# Altium PCB Duckuino.PcbDoc
Units mm, origin at the board's own origin, x right, y up, seen from the top; angles counter-clockwise.
Board outline 48.64 x 17.65 mm, 2 copper layers (Top Layer, Bottom Layer); 29 components, 37 nets, 137 pads, 36 vias.
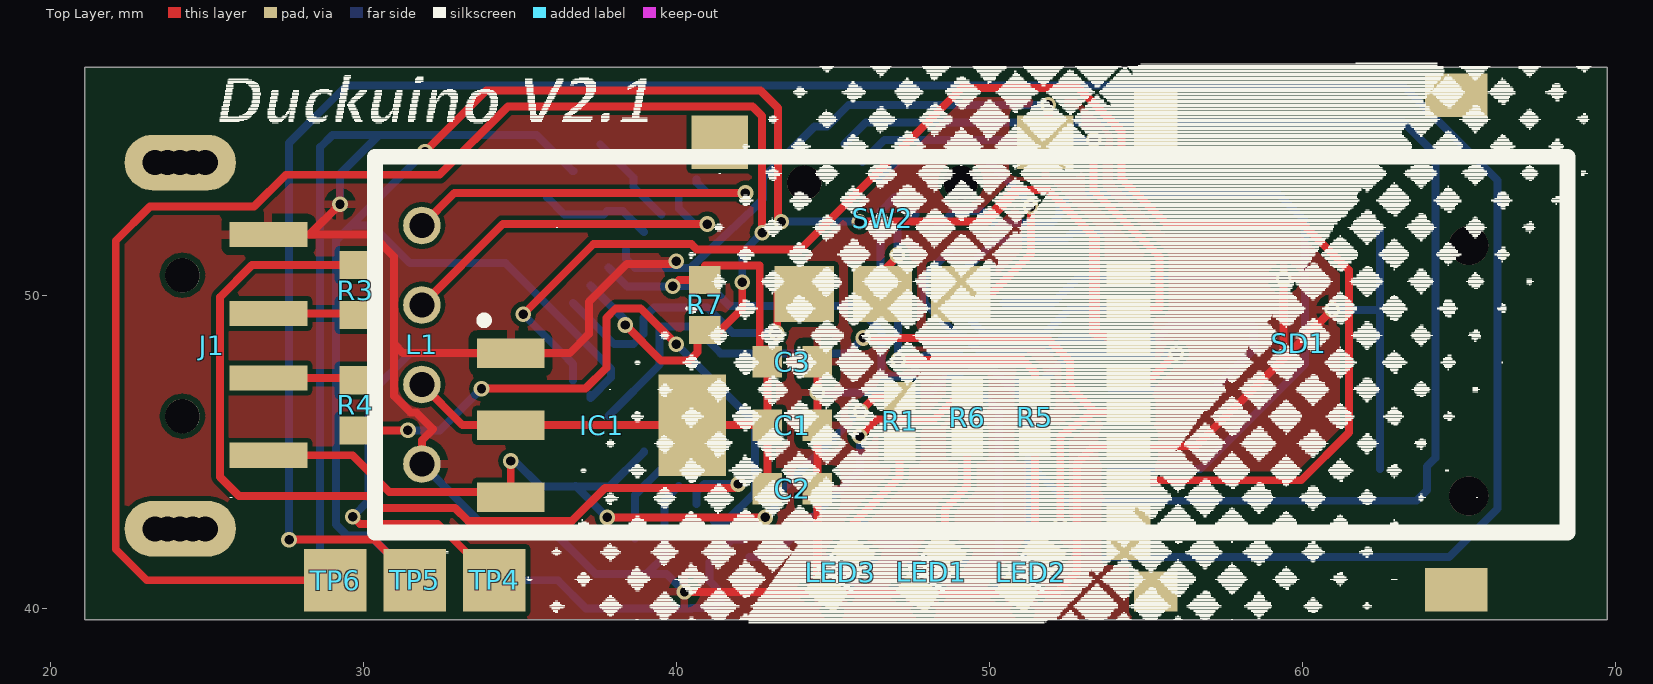
[diagram p0: Top Layer view]
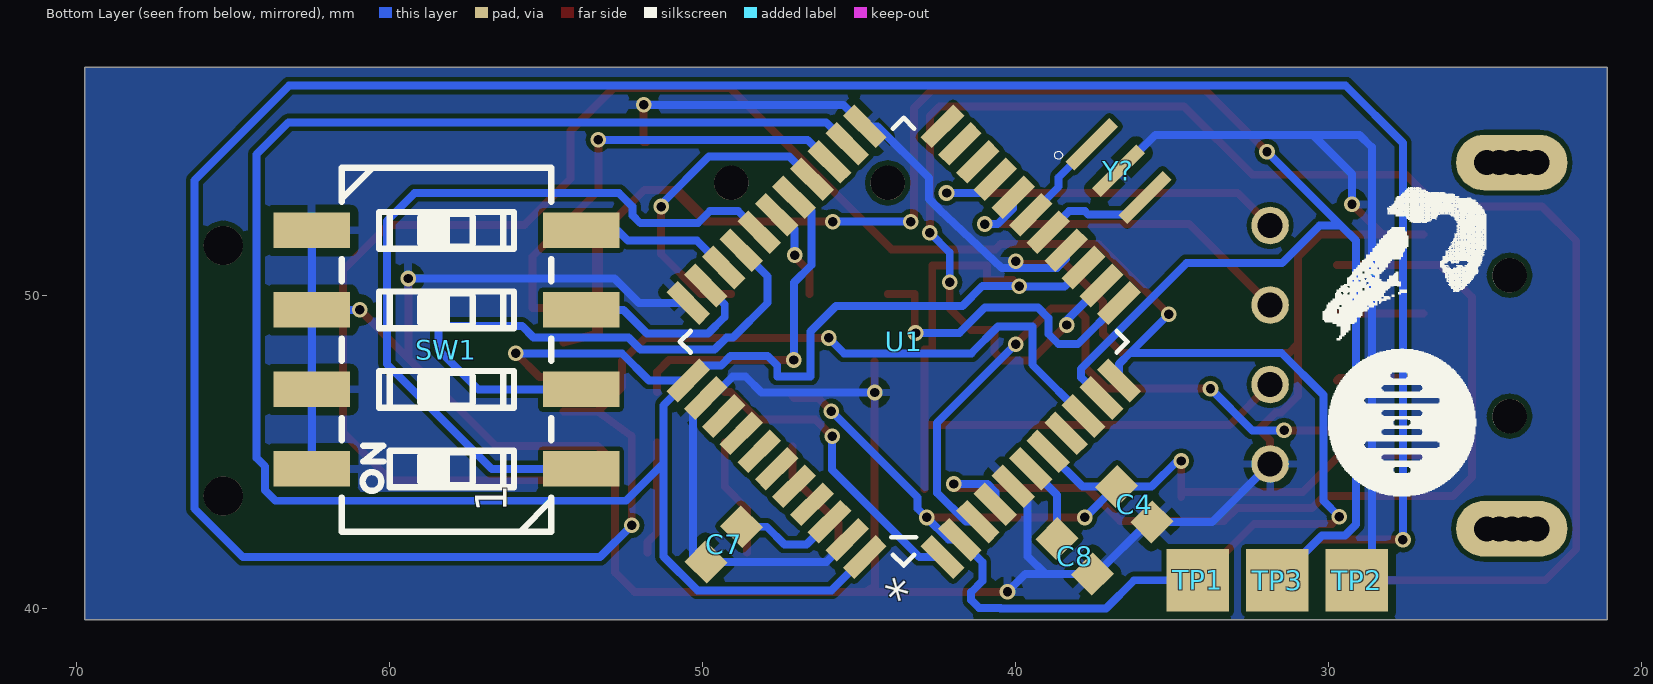
[diagram p1: Bottom Layer view, seen from below]
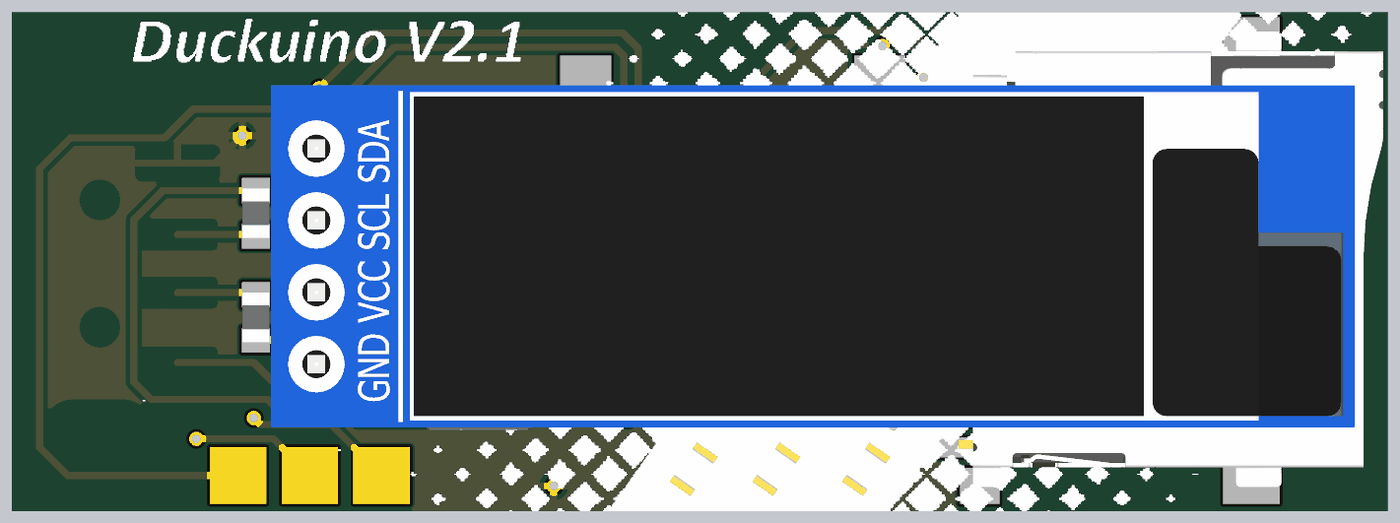
[diagram p2: 3D render of the assembled board from above, using the file's embedded part models]
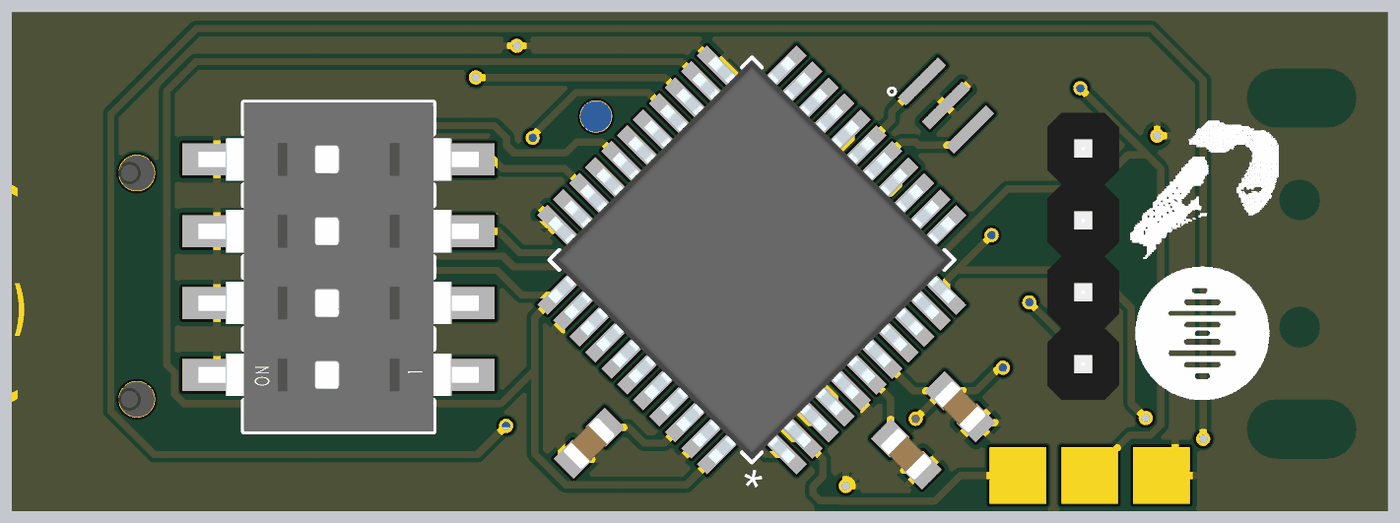
[diagram p3: 3D render of the assembled board from below, using the file's embedded part models]

## Layer stack, top to bottom
Top Solder: solder mask 0.0102, Solder Resist, Dk 3.5
Top Layer: signal copper 0.0356
Dielectric 1: dielectric 0.32, FR-4, Dk 4.8
Bottom Layer: signal copper 0.0356
Bottom Solder: solder mask 0.0102, Solder Resist, Dk 3.5

## Board outline
21.082,39.624 69.723,39.624 69.723,57.277 21.082,57.277

## Design rules (kind name [scope] priority, off if disabled: settings)
Clearance [All] p1: gap=0.152 ignorepadtopadclearanceinfootprint=FALSE except(0.254: Arc-Arc Arc-Track Track-Track)
ComponentClearance [All] p1: gap=0 collisioncheckmode=3 verticalgap=0 showdistances=FALSE
PolygonConnect [All] p1: connectstyle=Relief reliefconductorwidth=0.254 reliefentries=4 polygonreliefangle="90 Angle" airgapwidth=0.254
RoutingCorners [All] p1: cornerstyle=Round minsetback=2.54 maxsetback=2.54
RoutingLayers RoutingLayers_1 [All] p1: top layer_v5=TRUE bottom layer_v5=TRUE
RoutingVias [All] p1: holewidth=0.3 width=0.5 viastyle="Through Hole" minholewidth=0.3 minwidth=0.5 maxholewidth=0.3 maxwidth=0.5
ShortCircuit [All] p1: allowed=TRUE
SolderMaskExpansion [All] p1: expansion=0.102
Width [All] p1: maxlimit=0.254 minlimit=0.254 preferedwidth=0.254
26 further rules are at their usual default settings.

## Components (designator, comment, footprint, x,y, rotation, side; value= is the part's Value field where it differs from the comment)
C1 "0.1uF" CAPC1608X87N 43.688,45.847 r180 top value=12nF
C2 "1uF" CAPC1608X87N 43.688,43.815 r180 top value=12nF
C3 "10uF" CAPC1608X87N 43.688,47.879 r180 top value=12nF
C4 "10uF" CAPC1608X87N 36.195,43.323 r45 bottom value=12nF
C7 "0.1uF" CAPC1608X87N 49.308,42.037 r135 bottom value=12nF
C8 "1uF" CAPC1608X87N 38.1,41.656 r45 bottom value=12nF
IC1 "LM1117MP-1.8/NOPB" SOT230P700X180-4N 37.592,45.847 r0 top
J1 "" USB-A-SMT-MALE 16.002,48.387 r0 top
L1 "OLED I2C 0.96' 128X64" "OLED I2C 0.91" 49.403,48.768 r0 top locked
LED1 "" "LED 0603" 48.133,41.148 r235 top
LED2 "" "LED 0603" 51.308,41.148 r235 top
LED3 "" "LED 0603" 45.212,41.148 r235 top
R1 "22kR" RESC1608X55N 47.117,45.974 r270 top value=0
R3 "22R" RESC1608X55N 29.718,50.165 r90 top value=0
R4 "22R" RESC1608X55N 29.718,46.482 r270 top value=0
R5 "330" RESC1608X55N 51.435,46.101 r270 top value=0
R6 "330" RESC1608X55N 49.276,46.101 r270 top value=0
R7 "10k" RESC1608X55N 40.894,49.688 r270 top value=0
SD1 "" TF-PULL 62.047,48.488 r270 top
SW1 "Switch" SW_CTS_219-4MST 58.166,48.26 r0 bottom
SW2 "ThumbWheel" THUMBWHEEL 44.069,50.038 r0 top
TP1 "Test pad" TP20SQ#1 34.163,40.894 r0 top
TP2 "Test pad" TP20SQ#1 29.083,40.894 r0 top
TP3 "Test pad" TP20SQ#1 31.623,40.894 r0 top
TP4 "Test pad" TP20SQ#2 34.163,40.894 r0 top
TP5 "Test pad" TP20SQ#2 31.623,40.894 r0 top
TP6 "Test pad" TP20SQ#2 29.083,40.894 r0 top
U1 "" QFP80P1200X1200X120-44N 43.561,48.514 r45 bottom
Y? "CSTCE8M00G55-R0" OSC_CSTCE8M00G55-R0 36.703,53.975 r225 bottom

## Footprints (in the part's own frame and the unit in brackets; to place one, negate y for a bottom-side part, rotate by r counter-clockwise, add the part's x,y. Pads: shape width x height; smd on the part's side, far side on the other; paste and mask are expansions set on the pad)
CAPC1608X87N [mm] "Chip Capacitor, Body 1.6x0.8mm IPC Medium Density"
  rect 0.95x1 smd: 1(-0.8,0) 2(0.8,0)
  body extent -0.87,-0.47 0.88,0.48, height 0.87
"LED 0603" [mm]
  rect 0.8x1.2 smd: 1(-0.762,0) 2(0.762,0)
  silkscreen extent -0.25,-0.65 0.25,0.63, body extent -0.81,-0.45 0.89,0.45, height 0.75
"OLED I2C 0.91" [mm]
  round 1.2 hole 0.8: 1(-17.55,-4.16) 2(-17.55,-1.62) 3(-17.55,0.92) 4(-17.55,3.46)
  Top Overlay keep-out lines w0.5: 18.95,-6.35 -19.05,-6.35 -19.05,5.65 18.95,5.65 ; 19.05,-6.35 19.05,5.65
  silkscreen extent -19.05,-6.35 19.05,5.65, body extent -19.15,-6.18 19.15,5.92, height 4.51
OSC_CSTCE8M00G55-R0 [mm]
  rect 0.4x2 smd: 1(-1.2,0) 2(0,0) 3(1.2,0)
  silkscreen extent -1.83,-1.13 -1.57,-0.87
QFP80P1200X1200X120-44N [mil]
  rect 58x20 smd: 1(-226,157) 2(-226,126) 3(-226,94) 4(-226,63) 5(-226,31) 6(-226,0) 7(-226,-31) 8(-226,-63) 9(-226,-94) 10(-226,-126) 11(-226,-157) 23(226,-157) 24(226,-126) 25(226,-94) 26(226,-63) 27(226,-31) 28(226,0) 29(226,31) 30(226,63) 31(226,94) 32(226,126) 33(226,157)
  rect 20x58 smd: 12(-157,-226) 13(-126,-226) 14(-94,-226) 15(-63,-226) 16(-31,-226) 17(0,-226) 18(31,-226) 19(63,-226) 20(94,-226) 21(126,-226) 22(157,-226) 34(157,226) 35(126,226) 36(94,226) 37(63,226) 38(31,226) 39(0,226) 40(-31,226) 41(-63,226) 42(-94,226) 43(-126,226) 44(-157,226)
  silkscreen extent -199,-199 199,199, body extent -236,-236 236,236, height 47
RESC1608X55N [mm] "Chip Resistor, EIA 0603, Metric 1608, Body 1.6x0.8mm, IPC Medium Density"
  rect 0.9x1 smd: 1(-0.8,0) 2(0.8,0)
  body extent -0.87,-0.47 0.88,0.48, height 0.55
SOT230P700X180-4N [mm] "SOT223, 2.30mm pitch; 3 pin, 3.70mm W X 6.70mm L, IPC Medium Density"
  rect 2.15x0.95 smd: 1(-2.9,2.3) 2(-2.9,0) 3(-2.9,-2.3)
  rect 2.15x3.25 smd: 4(2.9,0)
  silkscreen extent -3.87,3.23 -3.62,3.47, body extent -3.65,-3.35 3.65,3.35, height 1.81
SW_CTS_219-4MST [mm] "Pitch 2.54mm, Body 6.7 x 11.63mm, 4 Ways SPST Surface-Mounting DIP Switch, CTS 219 Series"
  rect 2.44x1.13 smd: 1(-4.3,3.81) 2(-4.3,1.27) 3(-4.3,-1.27) 4(-4.3,-3.81) 5(4.3,-3.81) 6(4.3,-1.27) 7(4.3,1.27) 8(4.3,3.81)
  silkscreen extent -3.35,-5.82 3.35,5.82, body extent -4.95,-5.81 4.96,5.82, height 4.3
TF-PULL [mm]
  round 1.25 hole 1.25: 1(-3.1,3.25) 1(4.9,3.25)
  rect 0.7x1.4 smd: 1(-2.2,-7.62) 2(-1.1,-7.62) 3(0,-7.62) 4(1.1,-7.62) 5(2.2,-7.62) 6(3.3,-7.62) 7(4.4,-7.62) 8(5.5,-7.62) 9(6.6,-7.62)
  rect 1.4x2 smd: S1(-7.9,2.85) S2(7.9,2.85)
  rect 1.28x1.4 smd: S3(7.96,-6.75)
  rect 1.95x1.4 smd: S4(-7.025,-6.75)
  body extent -8.1,-7.49 8,7.51, height 1.85
THUMBWHEEL [mm]
  rect 1.9x1.8 smd: 1(0,0) 2(5,0) T(2.5,0)
  rect 1.8x1.7 smd: C(7.7,4.85) ""(-2.7,4.85)
  round 1.1 hole 1.1: ""(0,3.55) ""(5,3.55)
TP20SQ#1 [mm]
  rect 2x2 smd far side paste-1: TP(0,0)
TP20SQ#2 [mm]
  rect 2x2 smd paste-1: TP(0,0)
USB-A-SMT-MALE [mil]
  round 31.5 hole 31.5: 1(288.58,-230.32) 1(288.58,230.32) 1(304.33,-230.32) 1(304.33,230.32) 1(335.83,-230.32) 1(335.83,230.32) 1(351.57,-230.32) 1(351.57,230.32)
  round 43.31 hole 43.31: 1(322.83,-88.58) 1(322.83,88.58)
  rect 98.43x31.5 smd: D+1(431.1,40.43) D-1(431.1,-40.43) GND1(431.1,139.8) VBUS1(431.1,-137.8)
  oval 140x70 hole 31.5: SHLD1(320.08,-230.32) SHLD2(320.08,230.32)
  body extent -375,-238 424,258, height 177

## Part data
C1 C2 C3 C4 C7 C8: library part CC0603_12NF_50V_10%_X7R, "Non-polarised capacitor", Case=0603, Manufacturer=GENERIC, Manufacturer1 ComponentHeight=0.87mm, Manufacturer1 Example=PHYCOMP, Manufacturer1 Part Number=223858615637, Tolerance=±10%, Voltage=50V, Author="CERN DEM JLC", Component Type=Standard, CreateDate=03/12/2007, HelpURL=\\cern.ch\dfs\Applications\Altium\Datasheets\CC0603_X7R_PHYCOMP.pdf, LatestRevisionDate=03/12/2007, Manufacturer Part Number=CC0603_12NF_50V_10%_X7R, Mounted=Yes, Part Description="SMD Multilayer Chip Ceramic Capacitor", Part Number=CC0603_12NF_50V_10%_X7R, Pin Count=2, Sense=No, SMD=Yes, Socket=No, Status=Preferred, TC=X7R
IC1: "3-Terminal Regulator 1=GND 2=OUT 3=IN 4=OUT", Case=SOT223, Manufacturer="TEXAS INSTRUMENTS", Author="CERN DEM JLC", Bonding=No, ComponentHeight=1.8mm, Component Type=Standard, CreateDate=18/01/2011, Device=LM1117MP-1.8/NOPB, HelpURL=\\cern.ch\dfs\Applications\Altium\Datasheets\LM1117MP-1.8-NOPB.pdf, LatestRevisionDate=16/09/2014, Manufacturer Part Number=LM1117MP-1.8/NOPB, Mounted=Yes, PackageDescription="SOT223, 2.30mm pitch; 3 pin, 3.70mm W X 6.70mm L, IPC Medium Density", Part Description="1.8V 800mA Low-Dropout Linear Regulator", Part Number=LM1117MP-1.8/NOPB, Pin Count=4, PressFit=No, Sense=No, SMD=Yes, Socket=No
J1: library part USB_A_SMT_MALE, PROD_ID=CONN-11499
LED1 LED2 LED3: library part LED
R1 R3 R4 R5 R6 R7: library part R0603_0R_JUMPER, "Resistor", Case=0603, Manufacturer=GENERIC, Manufacturer1 ComponentHeight=0.55mm, Manufacturer1 Example="NIC COMPONENT", Manufacturer1 Part Number=NRC06Z0, Author="CERN DEM JLC", Component Type=Standard, CreateDate=03/12/2007, HelpURL=\\cern.ch\dfs\Applications\Altium\Datasheets\R0603_NIC_NRC.pdf, LatestRevisionDate=13/03/2008, Manufacturer Part Number=R0603_0R_JUMPER, Mounted=Yes, Part Description="1A (0.05R Max DC Resistance) Zero Ohm Jumper", Part Number=R0603_0R_JUMPER, Pin Count=2, PressFit=No, Sense=No, SMD=Yes, Socket=No, Status=Preferred
SD1: library part TF-HOLDER
SW1: library part SW_CTS_219-4MST, "4 Ways SPST DIP Switch", Manufacturer="CTS ELECTROCOMPONENTS", Manufacturer Part Number=219-4MST, Author="CERN DEM JLC", ComponentHeight=2.23mm, Component Type=Standard, CreateDate=17/11/2014, Family=Switch, HelpURL=\\cern.ch\dfs\Applications\Altium\Datasheets\SW_CTS_219-4MST.pdf, LatestRevisionDate=17/11/2014, Mounted=Yes, PackageDescription="Pitch 2.54mm, Body 6.7 x 11.63mm, 4 Ways SPST Surface-Mounting DIP Switch, CTS 219 Series", Part Description="4 Ways, Pitch 2.54mm, SPST DIP Switch, Rating 100mA 50VDC", Part Number=SW_CTS_219-4MST, Pin Count=8, PressFit=No, Sense=No, SMD=Yes, Socket=No, Status=None
TP1 TP2 TP3 TP4 TP5 TP6: library part TPTP20SQ
U1: library part ATMEGA32U4-AU, PACKAGE=TQFP-44, MPN=ATMEGA32U4-AU, OC_FARNELL=1748525, OC_NEWARK=26R5633, SUPPLIER=Atmel
Y?: "Ceramic Resonator 8MHz ??0.5% _Tol_ ??0.2% _Stability_ 33pF 40Ohm 3-Pin CSMD T/R", PACKAGE="SMD-3 Murata", Availability=Good, MF=Murata, MP=CSTCE8M00G55-R0, Price="0.27 USD", SnapEDA_Link=https://www.snapeda.com/parts/CSTCE8M00G55-R0/Murata%20Electronics%20North%20America/view-part/?ref=snap

## Via types
v1: diameter 0.5, hole 0.3, Top Layer to Bottom Layer, 36 vias

## Nets (pads, with @x,y where several pads share a name; then routed paths per layer and width w, separated by ;. In a path a pad name is that pad's centre, name@x,y a point inside that pad or via, vN(x,y) a via of type N, cw(c..) or ccw(c..) an arc to the next point about the centre after c; other vN are vias at no path point)
3V3: C1.2 C2.2 C3.2 IC1.2 IC1.4 L1.2 R7.1 SD1.4 U1.14 U1.24 U1.34 U1.44 | length 102.8
  Top Layer w0.254: L1.2 33.154,45.847 IC1.2 IC1.4 C1.2 ; v1(39.867,50.281) 40.074,50.488 R7.1 40.894,50.952 42.647,50.952 42.647,48.26 42.888,48.26 C3.2 C1.2 ; C2.2 C1.2 ; SD1.4 55.194,47.388 v1(55.951,48.144)
  Bottom Layer w0.254: U1.14 38.417,50.281 v1(39.867,50.281) ; v1@39.878,50.292 41.046,50.292 41.681,49.657 45.72,49.657 46.533,48.844 46.533,47.4 47.6,47.4 47.6,47.752 47.904,48.057 49.091,48.057 49.39,47.757 49.957,47.757 U1.34 ; U1.44 45.872,40.564 50.14,40.564 51.232,41.656 51.232,44.635 ; U1.24 46.045,55.524 63.213,55.524 64.237,54.501 64.237,44.806 63.965,44.534 63.965,43.769 63.63,43.434 52.433,43.434 51.232,44.635 ; v1(55.951,48.144) 52.566,48.144 51.696,47.275 U1.34 ; U1.34 51.232,46.483 51.232,44.635
A0: U1.36
A1: U1.37
A2: U1.38
A3: U1.39
D0/RX: U1.20
D1/TX: U1.21
D2/SDA: L1.4 U1.19 | length 12.6
  Top Layer w0.254: L1.4 32.889,53.264 v1(42.189,53.264)
  Bottom Layer w0.254: U1.19 40.633,53.601 40.97,53.264 v1(42.189,53.264)
D3/SCL: L1.3 U1.18 | length 11.7
  Top Layer w0.254: L1.3 34.438,52.273 v1(40.97,52.273)
  Bottom Layer w0.254: U1.18 40.059,52.771 40.556,52.273 v1(40.97,52.273)
D4/A6: SD1.2 U1.25 | length 14.9
  Top Layer w0.254: v1(53.315,54.966) 53.315,53.34 55.423,51.232 55.423,49.588 SD1.2
  Bottom Layer w0.254: U1.25 46.636,54.966 v1(53.315,54.966)
D5: SW1.4 U1.31 | length 5.1
  Bottom Layer w0.254: U1.31@49.308,50.913 U1.31 50.167,51.744 52.372,51.744 52.698,52.07 SW1.4
D6/A7: R5.1 U1.27 | length 10.9
  Top Layer w0.254: v1(47.066,47.93) 51.054,47.93 51.435,47.549 R5.1
  Bottom Layer w0.254: U1.27 47.063,53.137 46.965,53.137 46.511,52.684 46.511,50.959 47.066,50.405 v1(47.066,47.93)
D7: R6.1 U1.1 | length 9.8
  Top Layer w0.254: v1(45.847,45.494) 46.378,46.025 48.209,46.025 49.085,46.901 R6.1
  Bottom Layer w0.254: U1.1 43.059,41.635 45.847,44.423 v1(45.847,45.494)
D8/A8: SW2.T U1.28 | length 3.1
  Top Layer w0.254: SW2.T 46.569,50.749 47.041,51.221 v1(47.041,51.283)
  Bottom Layer w0.254: v1(47.041,51.283) 47.041,52.121 47.498,52.578 47.62,52.578 U1.28
D9/A9: SW1.1 U1.29 | length 25.4
  Bottom Layer w0.254: U1.29 48.844,52.684 49.755,52.684 50.136,52.303 51.973,52.303 52.223,52.552 52.223,52.828 52.659,53.264 59.182,53.264 60.071,52.375 60.071,47.803 56.718,44.45 SW1.1
D10/A10: SW1.2 U1.30 | length 19.3
  Bottom Layer w0.254: U1.30 47.904,50.594 47.904,49.759 49.011,48.652 49.214,48.652 49.601,48.265 51.968,48.265 52.355,48.652 55.383,48.652 55.753,49.022 58.42,49.022 58.42,48.26 57.15,46.99 SW1.2
D11: SW2.1 U1.12 | length 10.3
  Top Layer w0.254: v1(43.18,48.793) 43.205,48.819 43.205,50.038 SW2.1
  Bottom Layer w0.254: U1.12 37.998,48.437 38.608,48.437 38.938,48.767 38.938,49.276 39.27,49.608 40.968,49.608 41.783,48.793 v1(43.18,48.793)
D12: SW2.2 U1.26 | length 10.1
  Top Layer w0.254: SW2.2 50.038,50.038 51.308,51.308 v1(51.308,52.832)
  Bottom Layer w0.254: U1.26 47.216,54.432 49.784,54.432 51.308,52.908 v1(51.308,52.832)
D13: SW1.3 U1.32 | length 6.4
  Bottom Layer w0.254: U1.32 49.276,49.703 49.276,49.308 49.811,48.773 51.758,48.773 52.514,49.53 SW1.3
D14/MISO: SD1.7 TP4.TP U1.11 | length 64.6
  Top Layer w0.254: v1(29.642,42.926) 29.87,42.697 32.36,42.697 TP4.TP ; v1(35.09,49.39) 37.329,51.629 40.464,51.629 40.633,51.46 43.942,51.46 49.098,56.617 52.832,56.617 54.204,55.245 54.204,53.72 55.676,52.248 60.02,52.248 61.468,50.8 61.468,45.612 59.944,44.088 SD1.7
  Bottom Layer w0.254: v1(29.642,42.926) 30.15,43.434 30.15,46.812 31.496,48.158 36.322,48.158 ; v1(35.09,49.39) 36.322,48.158 ; U1.11 36.682,47.798 36.322,48.158
D15/SCK: SD1.5 TP5.TP U1.9 | length 108.1
  Top Layer w0.254: v1(27.61,42.189) 30.328,42.189 TP5.TP ; v1(45.956,48.635) 51.816,48.635 52.559,47.892 52.559,47.07 53.34,46.288 ; v1(52.248,42.647) 52.248,45.501 53.34,46.288 ; SD1.5 53.34,46.288
  Bottom Layer w0.254: v1(27.61,42.189) 27.61,54.864 29.439,56.693 63.195,56.693 66.218,53.67 66.218,43.18 64.673,41.635 53.259,41.635 v1(52.248,42.647) ; U1.9 39.45,47.78 39.45,49.001 40.542,49.001 41.398,48.144 45.465,48.144 v1(45.956,48.635)
D16/MOSI: SD1.3 TP3.TP U1.10 | length 65.9
  Top Layer w0.254: v1(31.953,54.585) 33.909,56.54 42.672,56.54 43.231,55.982 43.231,52.451 v1(43.332,52.349) ; v1(45.822,52.349) 49.767,52.349 ; 49.767,52.349 50.779,53.361 50.923,53.361 ; 49.767,52.349 49.911,52.349 50.923,53.361 ; 50.923,53.361 50.927,53.365 51.841,53.365 51.845,53.361 ; 50.923,53.361 51.845,53.361 ; 51.845,53.361 53.29,51.917 ; 53.29,51.917 53.29,48.768 SD1.3 53.391,48.768 53.391,51.816 53.29,51.917
  Bottom Layer w0.254: TP3.TP 30.197,42.32 29.464,42.32 29.112,42.672 29.112,51.744 29.597,52.228 ; v1(31.953,54.585) 29.597,52.228 ; U1.10@37.239,46.812 U1.10 37.899,47.378 37.899,47.648 34.523,51.024 31.474,51.024 30.27,52.228 29.597,52.228 ; v1(43.332,52.349) v1(45.822,52.349)
D+: R3.2 U1.4 | length 29.9
  Top Layer w0.254: R3.2 26.429,50.965 25.4,49.936 25.4,44.196 26.01,43.586 30.127,43.586 30.508,43.205 32.912,43.205 33.325,42.793 36.652,42.793 37.7,43.84 41.834,43.84 v1(41.961,43.967)
  Bottom Layer w0.254: U1.4 40.633,43.718 40.882,43.967 v1(41.961,43.967)
D-: R4.2 U1.3 | length 20.8
  Top Layer w0.254: R4.2 v1(31.407,45.682) ; v1(33.757,47.015) 37.084,47.015 37.744,47.676 37.744,49.276 38.049,49.581 38.837,49.581 v1(39.98,48.438)
  Bottom Layer w0.254: v1(31.407,45.682) 32.423,45.682 v1(33.757,47.015) ; v1(39.98,48.438) 42.494,45.923 42.494,43.688 41.573,42.767 U1.3
GND: C1.1 C2.1 C3.1 C4.1 C7.1 C8.1 IC1.1 J1.GND1 L1.1 LED1.2 LED2.2 LED3.2 SD1.6 SW1.5 SW1.6 SW1.7 SW1.8 SW2.C TP2.TP U1.5 U1.15 U1.23 U1.33 U1.35 U1.43 Y?.2 | length 152.7
  Top Layer w0.254: J1.GND1 28.265,51.938 ; v1(29.235,52.908) 28.265,51.938 ; L1.1 31.853,45.366 32.207,45.72 31.674,46.253 31.496,46.253 30.963,46.787 30.963,48.438 ; v1(39.98,51.079) 39.903,51.003 38.405,51.003 37.186,49.784 37.186,48.757 36.576,48.147 IC1.1 31.253,48.147 30.963,48.438 ; v1(40.241,40.524) LED3.2 ; C3.1 v1(44.488,46.892) C1.1 C2.1 44.488,41.583 44.475,41.571 44.475,40.639 44.611,40.639 LED3.2 ; SW2.C 51.867,54.888 v1(51.867,56.083) ; v1(59.385,50.535) 59.385,47.982 ; v1(60.933,49.53) 59.385,47.982 ; 28.265,51.938 30.256,51.938 30.963,51.232 30.963,48.438 ; LED3.2 LED1.2 LED2.2 52.157,40.524 52.781,41.148 52.781,44.629 53.34,45.188 SD1.6 56.591,45.188 59.385,47.982
  Bottom Layer w0.254: TP2.TP 29.083,41.633 28.604,41.633 28.604,54.728 28.994,55.118 30.48,55.118 ; v1(29.235,52.908) 29.235,53.873 30.48,55.118 ; L1.1 33.703,42.758 C4.1 35.738,42.758 37.405,41.09 C8.1 39.033,41.09 ; Y?.2 36.663,53.975 35.52,55.118 30.48,55.118 ; U1.15 38.37,51.165 38.659,50.876 39.776,50.876 ; v1(39.98,51.079) 39.776,50.876 ; U1.5 39.599,43.438 39.599,41.656 39.033,41.09 ; v1(40.241,40.524) 39.675,41.09 39.033,41.09 ; v1(44.488,46.892) 48.104,46.892 48.608,47.396 49.033,47.396 49.711,46.718 U1.35 50.292,46.309 50.292,41.478 49.874,41.478 C7.1 46.032,41.471 45.357,42.146 U1.43 ; U1.33 52.019,49.753 52.801,50.535 v1(59.385,50.535) ; v1(51.867,56.083) 45.491,56.083 U1.23 44.395,55.393 42.753,53.752 42.753,53.07 42.418,52.734 40.422,50.876 39.776,50.876 ; v1(60.933,49.53) SW1.6 ; SW1.8 SW1.7 SW1.6 ; SW1.5 SW1.6
NetC7_2: C7.2 U1.42 | length 3.3
  Bottom Layer w0.254: U1.42 46.661,42.037 47.371,42.037 47.937,42.603 C7.2
NetC8_2: C8.2 U1.6 | length 2.6
  Bottom Layer w0.254: C8.2 38.666,43.619 U1.6
NetJ1_D+1: J1.D+1 R3.1 | length 2.8
  Top Layer w0.254: J1.D+1 29.669,49.414 R3.1
NetJ1_D-1: J1.D-1 R4.1 | length 2.8
  Top Layer w0.254: J1.D-1 29.64,47.36 R4.1
NetLED1_1: LED1.1 R6.2 | length 3.8
  Top Layer w0.254: LED1.1 48.57,43.18 49.276,43.886 R6.2
NetLED2_1: LED2.1 R5.2 | length 3.7
  Top Layer w0.254: R5.2 51.435,42.427 51.745,42.117 LED2.1
NetLED3_1: LED3.1 R1.2 | length 4
  Top Layer w0.254: LED3.1 45.649,42.723 47.117,44.191 R1.2
RESET: R7.2 TP6.TP U1.13 | length 53.3
  Top Layer w0.254: TP6.TP 23.063,40.894 22.073,41.885 22.073,51.74 23.165,52.832 26.492,52.832 27.508,53.848 32.418,53.848 34.602,56.032 42.418,56.032 42.723,55.728 v1(42.723,51.994) ; v1(38.354,49.047) 39.493,47.908 40.386,47.908 40.665,48.188 40.665,48.888 R7.2 41.402,48.888 42.088,49.574 v1(42.088,50.419)
  Bottom Layer w0.254: U1.13 38.354,49.195 v1(38.354,49.047) ; v1(42.088,50.419) 42.088,51.359 v1(42.723,51.994)
SS: U1.8
UVCC: C4.2 IC1.3 J1.VBUS1 R1.1 TP1.TP U1.2 U1.7 | length 39.4
  Top Layer w0.254: J1.VBUS1 29.637,44.887 30.81,43.713 IC1.3@34.692,43.713 ; IC1.3 IC1.3@34.692,43.713 ; v1(34.692,44.704) IC1.3@34.692,43.713 ; v1(37.77,42.901) v1(42.824,42.901) ; v1(45.868,46.295) 46.291,46.718 ; 46.291,46.718 47.061,46.718 R1.1 46.347,46.774 46.291,46.718
  Bottom Layer w0.254: TP1.TP 36.195,40.894 37.095,39.994 40.461,39.994 40.471,40.005 41.148,40.005 41.402,40.259 41.402,40.513 41.046,40.869 41.046,41.473 U1.2 42.123,42.192 v1@42.828,42.897 ; v1(34.692,44.704) 34.823,44.704 35.638,43.889 C4.2 ; v1(37.77,42.901) C4.2@36.781,43.889 ; U1.7 38.945,44.983 37.851,43.889 C4.2@36.781,43.889 ; v1(42.824,42.901) v1@42.828,42.897 ; v1(45.868,46.295) 43.111,43.538 43.111,43.18 v1@42.828,42.897 ; C4.2 36.761,43.91 C4.2@36.781,43.889 ; C4.2 C4.2@36.781,43.889
XTAL1: U1.17 Y?.1 | length 3.1
  Bottom Layer w0.254: Y?.1 38.608,53.767 38.608,53.467 U1.17
XTAL2: U1.16 Y?.3 | length 3.6
  Bottom Layer w0.254: Y?.3 36.408,52.573 37.663,52.573 37.774,52.684 38.278,52.684 U1.16
pads on no net: J1.1 J1.SHLD1 J1.SHLD2 SD1.1 SD1.8 SD1.9 SD1.S1 SD1.S2 SD1.S3 SD1.S4 SW2. U1.22 U1.40 U1.41

## Polygon pours and split planes (outlines as drawn)
GND on Bottom Layer "GND - BOT" (solid, remove dead copper, pour order 14): 21.082,39.624 21.082,57.277 69.723,57.277 69.723,39.624
GND on Top Layer "GND - TOP" (solid, remove dead copper, pour order 12): 20.955,57.277 20.955,39.624 69.723,39.624 69.85,39.751 69.85,57.277

## Silkscreen, mask and mechanical layers (free items; w line width, h text height)
Top Overlay:
  drawing of 5793 lines, arcs and shapes, not listed
Bottom Overlay:
  drawing of 945 lines, arcs and shapes, not listed
Bottom Solder:
  text "( ͡º ͜ʖ ͡º )" at 64.643,43.18 h3 r270
Mechanical 6:
  lines w0.254: 17.145,17.78 17.272,17.653 ; 20.932,58.42 20.932,58.928 ; 22.456,58.166 20.932,58.674 ; 22.456,59.182 20.932,58.674 ; 37.292,58.674 20.932,58.674 ; 53.34,58.674 69.7,58.674 ; 68.176,58.166 69.7,58.674 ; 68.176,59.182 69.7,58.674 ; 69.7,58.42 69.7,58.928 ; 72.619,41.044 73.127,39.52 ; 72.619,55.776 73.127,57.3 ; 72.873,39.52 73.381,39.52 ; 72.873,57.3 73.381,57.3 ; 73.127,41.275 73.127,39.52 ; 73.127,55.545 73.127,57.3 ; 73.635,41.044 73.127,39.52 ; 73.635,55.776 73.127,57.3 ; 21.082,39.624 21.082,57.15 69.596,57.15 69.596,39.624 21.082,39.624
  text "48.768 (mm)" at 37.546,57.76 h1.52
  text "17.78 (mm)" at 74.041,41.529 h1.52 r90

## Text inside footprints (layer, text, board x,y; h text height)
J1: Mechanical 16 "PCB Edge" at 20.402,43.987 h1.97 r90
SW1: Bottom Overlay "1" at 56.241,43.06 h1 r270; Mechanical 14 "1" at 56.241,43.06 h1 r270
U1: Bottom Overlay "*" at 42.663,41.15 h1.97 r225